# Altium PCB PCB_mach_khuech_dai_music.PcbDoc
Units mm, origin at the board's own origin, x right, y up, seen from the top; angles counter-clockwise.
Board outline 41.91 x 22.22 mm, 2 copper layers (Top Layer, Bottom Layer); 10 components, 5 nets, 27 pads, 0 vias.
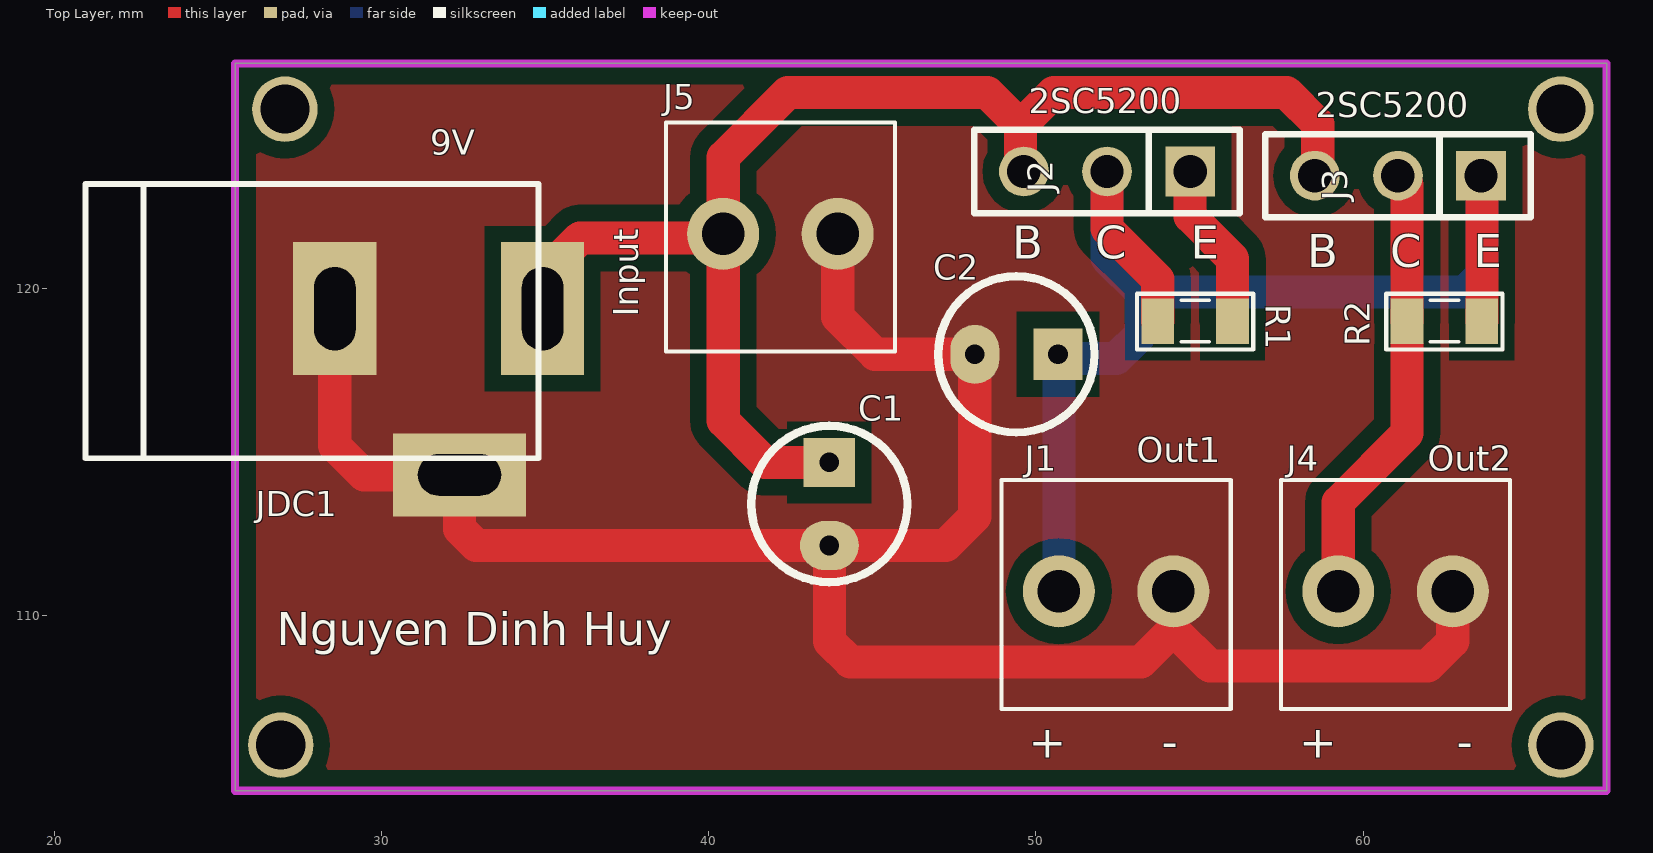
[diagram p0: Top Layer view]
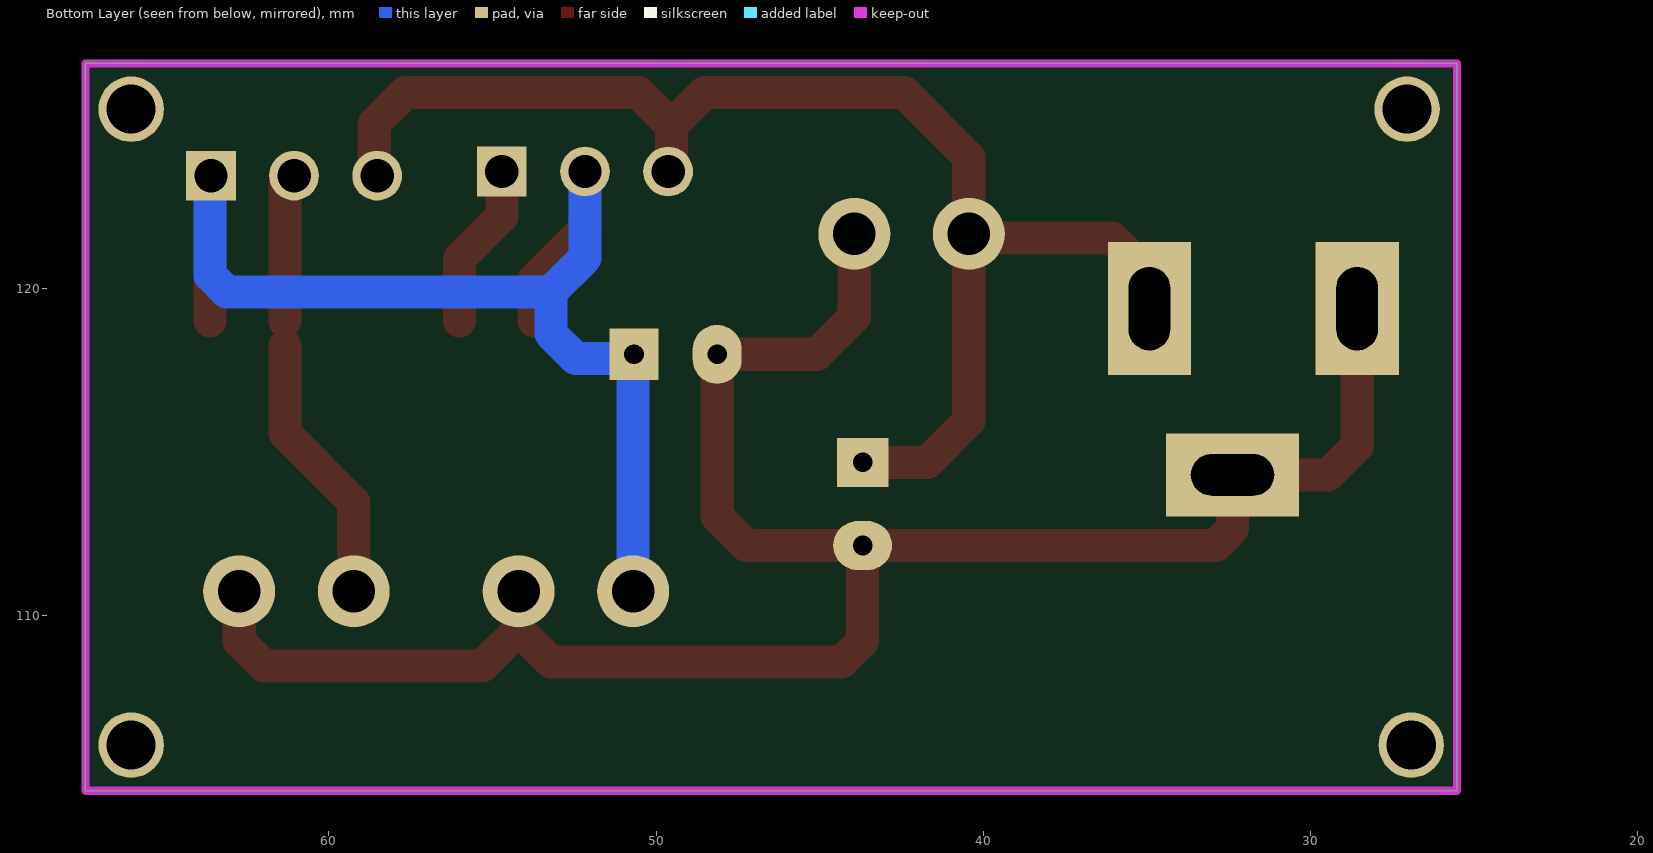
[diagram p1: Bottom Layer view, seen from below]
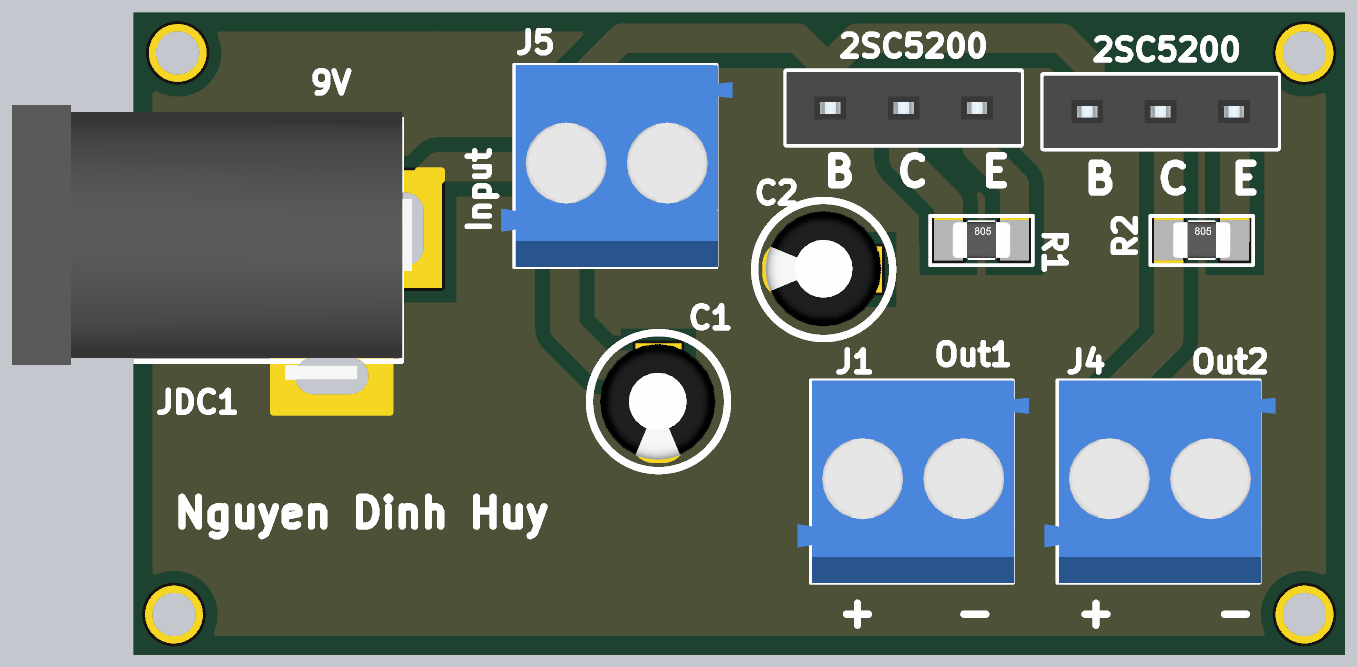
[diagram p2: 3D render of the assembled board from above, using the file's embedded part models]

## Layer stack, top to bottom
Top Solder: solder mask 0.0102, Solder Resist, Dk 3.5
Top Layer: signal copper 0.0356
Dielectric 1: dielectric 0.32, FR-4, Dk 4.8
Bottom Layer: signal copper 0.0356
Bottom Solder: solder mask 0.0102, Solder Resist, Dk 3.5

## Board outline
25.527,104.648 25.527,126.873 67.437,126.873 67.437,104.648

## Design rules (kind name [scope] priority, off if disabled: settings)
Clearance [All] p1: gap=0.508 ignorepadtopadclearanceinfootprint=FALSE except(0: Arc-Hole Track-Hole SMDPad-Hole THPad-Hole Via-Hole Fill-Hole Poly-Hole Region-Hole Text-Hole; 0.178: Arc-Arc Arc-Track Arc-Text Track-Track Track-Text SMDPad-Text THPad-Text Via-Text Text-Text; 0.254: Arc-SMDPad Arc-THPad Arc-Via Track-SMDPad Track-THPad Track-Via SMDPad-SMDPad SMDPad-THPad SMDPad-Via THPad-THPad THPad-Via Via-Via)
PolygonConnect [All] p1: connectstyle=Direct reliefconductorwidth=0.254 reliefentries=4 polygonreliefangle="90 Angle" airgapwidth=0.254
RoutingVias [All] p1: holewidth=2 width=2.27 viastyle="Through Hole" minholewidth=1 minwidth=1.27 maxholewidth=3 maxwidth=3.27
SolderMaskExpansion [All] p1: expansion=0.102
Width [All] p1: maxlimit=1.016 minlimit=0.254 preferedwidth=0.508
30 further rules are at their usual default settings.

## Components (designator, comment, footprint, x,y, rotation, side; value= is the part's Value field where it differs from the comment)
C1 "470uF/16V" C3MM 43.688,113.411 r270 top
C2 "220uF/16V" C3MM 49.403,117.983 r180 top
J1 "Out1" KF2-3.5 52.451,110.744 r0 top
J2 "2SC5200" JP3-C1T 54.712,123.571 r180 top value=J3
J3 "2SC5200" JP3-C1T 63.602,123.444 r180 top value=J3
J4 "Out2" KF2-3.5 60.988,110.744 r0 top
J5 "Input" KF2-3.5 42.192,121.666 r0 top
JDC1 "9V" DC-IN 31.75,116.84 r0 top value="Jac DC"
R1 "1k" RES-SMD-0805 54.864,118.999 r0 top
R2 "1k" RES-SMD-0805 62.484,118.999 r0 top

## Footprints (in the part's own frame and the unit in brackets; to place one, negate y for a bottom-side part, rotate by r counter-clockwise, add the part's x,y. Pads: shape width x height; smd on the part's side, far side on the other; paste and mask are expansions set on the pad)
C3MM [mm]
  rect 1.5x1.58 hole 0.6: 1(-1.27,0)
  oval 1.5x1.8 hole 0.6: 2(1.27,0)
  silkscreen extent -2.39,-2.39 2.39,2.39, body extent -2,-2.03 1.99,1.97, height 7.01
DC-IN [mil] "Jac DC input"
  rect 100x160 hole 50 slot 100 at 90 deg: 1(125,100) 2(-125,100)
  rect 160x100 hole 50 slot 100 at 0 deg: 3(25,-100)
  silkscreen extent -425,-80 120,250, body extent -410,-105 134,269, height 434
JP3-C1T [mm] "3 row, straight, gold plating"
  rect 1.52x1.52 hole 1.02: 1(0,0)
  round 1.52 hole 1.02: 2(2.54,0) 3(5.08,0)
  silkscreen extent -1.52,-1.27 6.6,1.27, body extent -1.52,-1.25 6.6,1.25, height 8.51
KF2-3.5 [mm] "3,50mm - modular - blue - Horizontal wire entry - Pressure clamp - 8,4mm height - 02p"
  round 2.2 hole 1.3: 1(-1.75,0) 2(1.75,0)
  silkscreen extent -3.5,-3.6 3.5,3.4, body extent -3.95,-3.6 4.05,3.4, height 8.41
RES-SMD-0805 [mil]
  rect 39.37x55 smd: 1(-45,0) 2(45,0)
  silkscreen extent -70,-34 70,33, body extent -39,-25 39,25, height 31

## Part data
C1 C2: library part "Cap Pol", "Polarized Capacitor (Axial)", LatestRevisionDate=17-Jul-2002, LatestRevisionNote="Re-released for DXP Platform.", PackageReference=POLAR0.8, Published=8-Jun-2000, Publisher="Altium Limited"
J1 J4 J5: library part KF2, Manufacturer="Würth Elektronik eiSos GmbH", partNo=691103110002, ComponentLink1 Description=Manufacturer, ComponentLink1URL=http://www.we-online.com, ComponentLink2 Description=Datasheet, ComponentLink2URL=http://katalog.we-online.de/em/datasheet/6911031100xx.pdf, Created by="Karrer Zheng", Created Date="29 October 2013", NoPins=2
J2 J3: library part JP3, "Jumper 3"
JDC1: library part DCIN, "Jac DC input"
R1 R2: library part "Resistor - SMD", "Resistor", Manufacturer="Generic Components", Class=Passive, Published=08/06/2000, Publisher="Altium Hobart Technology Centre"

## Free pads (board coordinates)
  round 2 hole 1.5: 2(27.051,125.476) 3(66.04,125.476) 4(66.04,106.045) 5(26.924,106.045)

## Nets (pads, with @x,y where several pads share a name; then routed paths per layer and width w, separated by ;. In a path a pad name is that pad's centre, name@x,y a point inside that pad or via, vN(x,y) a via of type N, cw(c..) or ccw(c..) an arc to the next point about the centre after c; other vN are vias at no path point)
+: C1.1 J2.3 J3.3 J5.1 JDC1.1 | length 42.2
  Top Layer w1.016: JDC1.1 34.925,120.396 36.068,121.539 40.315,121.539 J5.1 ; C1.1 41.712,114.681 40.442,115.951 J5.1 ; J2.3 49.53,123.673 49.53,124.968 ; J3.3@58.572,123.444 58.61,123.482 58.61,125.031 57.658,125.984 50.546,125.984 49.53,124.968 ; J5.1 40.442,124.008 42.418,125.984 48.514,125.984 49.53,124.968
GND: C1.2 C2.2 J1.2 J4.2 J5.2 JDC1.2 JDC1.3 | length 64.5
  Top Layer w1.016: JDC1.2@28.575,120.396 JDC1.2 28.575,115.189 29.464,114.3 JDC1.3 32.385,112.649 32.893,112.141 C1.2 ; J5.2 43.942,119.126 45.085,117.983 C2.2 48.133,113.03 47.244,112.141 C1.2 ; J4.2 62.738,109.22 61.976,108.458 55.316,108.458 54.201,109.573 53.213,108.585 44.323,108.585 43.688,109.22 C1.2
NetC2_1: C2.1 J1.1 J2.2 J3.1 R1.1 R2.2 | length 38.6
  Top Layer w1.016: J2.2 52.172,121.818 53.721,120.269 R1.1 ; R2.2 J3.1@63.627,123.444
  Bottom Layer w1.016: C2.1 C2.1@50.701,117.955 ; J1.1 C2.1@50.701,117.955 ; J2.2@52.172,123.317 52.172,120.929 53.213,119.888 ; J3.1@63.627,123.444 63.627,120.396 63.119,119.888 53.213,119.888 ; C2.1@50.701,117.955 50.8,117.856 52.451,117.856 53.213,118.618 53.213,119.888
NetJ2_1: J2.1 R1.2 | length 5.3
  Top Layer w1.016: J2.1@54.864,123.419 J2.1 54.712,122.199 56.007,120.904 R1.2
NetJ3_2: J3.2 J4.1 R2.1 | length 12.9
  Top Layer w1.016: J4.1 59.238,113.467 61.341,115.57 61.341,118.237 ; J3.2 61.341,123.165 R2.1

## Polygon pours and split planes (outlines as drawn)
GND on Top Layer "GND_Top" (solid, remove dead copper, pour order 4): 25.527,126.873 67.437,126.873 67.437,104.648 25.527,104.648

## Keep-outs
Keep-Out Layer:
  lines w0.254: 25.527,104.648 25.527,126.873 27.94,126.873 63.627,126.873 64.185,126.873 67.437,126.873 67.437,104.902 67.437,104.648 25.527,104.648

## Silkscreen, mask and mechanical layers (free items; w line width, h text height)
Top Overlay:
  text "B" at 49.276,120.904 h1
  text "C" at 51.816,120.904 h1
  text "E" at 54.737,120.904 h1
  text "B" at 58.293,120.65 h1
  text "C" at 60.833,120.65 h1
  text "E" at 63.373,120.65 h1
  text "Nguyen Dinh Huy" at 26.797,109.093 h1
  text "+" at 49.784,105.664 h1
  text "-" at 53.848,105.664 h1
  text "+" at 58.039,105.664 h1
  text "-" at 62.865,105.664 h1